# EAGLE board mega_shield_0_1 (EAGLE 6.5.0)
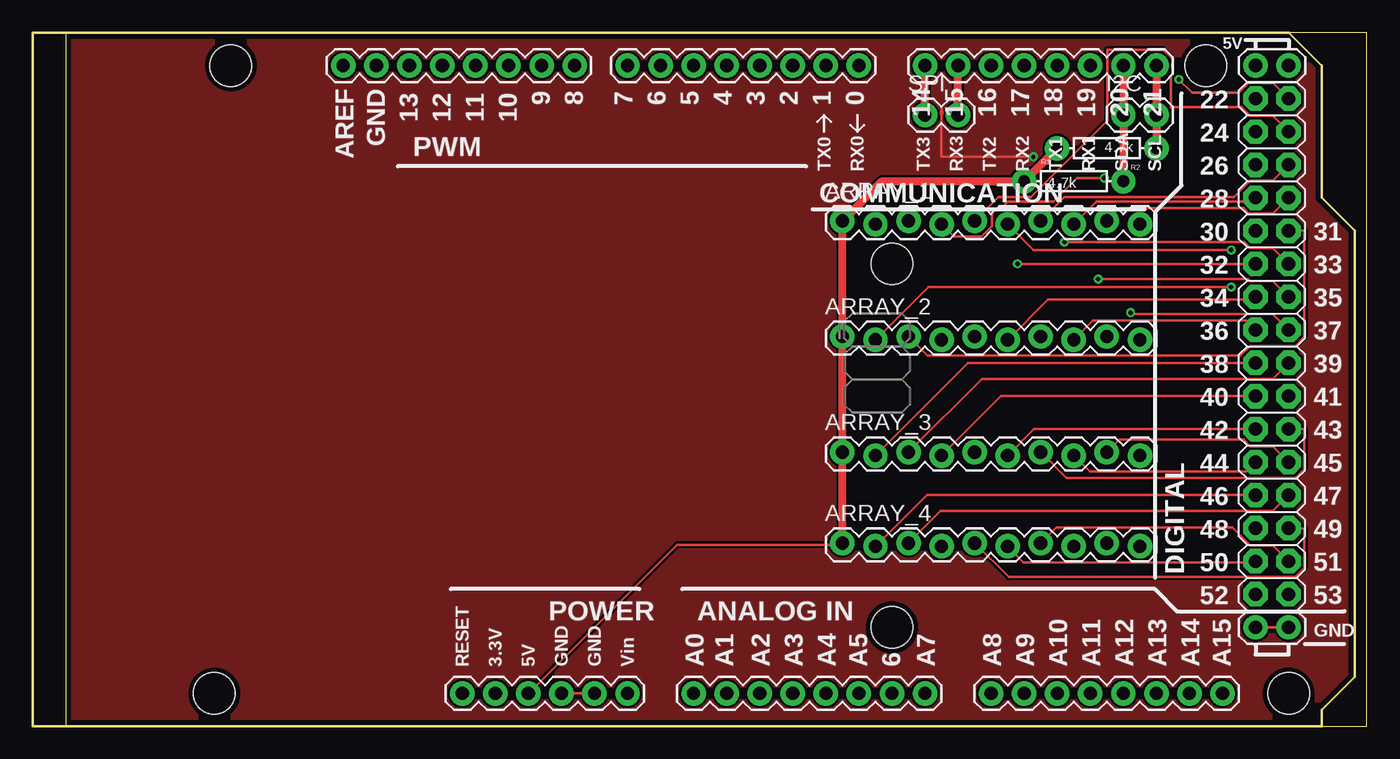
[diagram p0: board, top side]
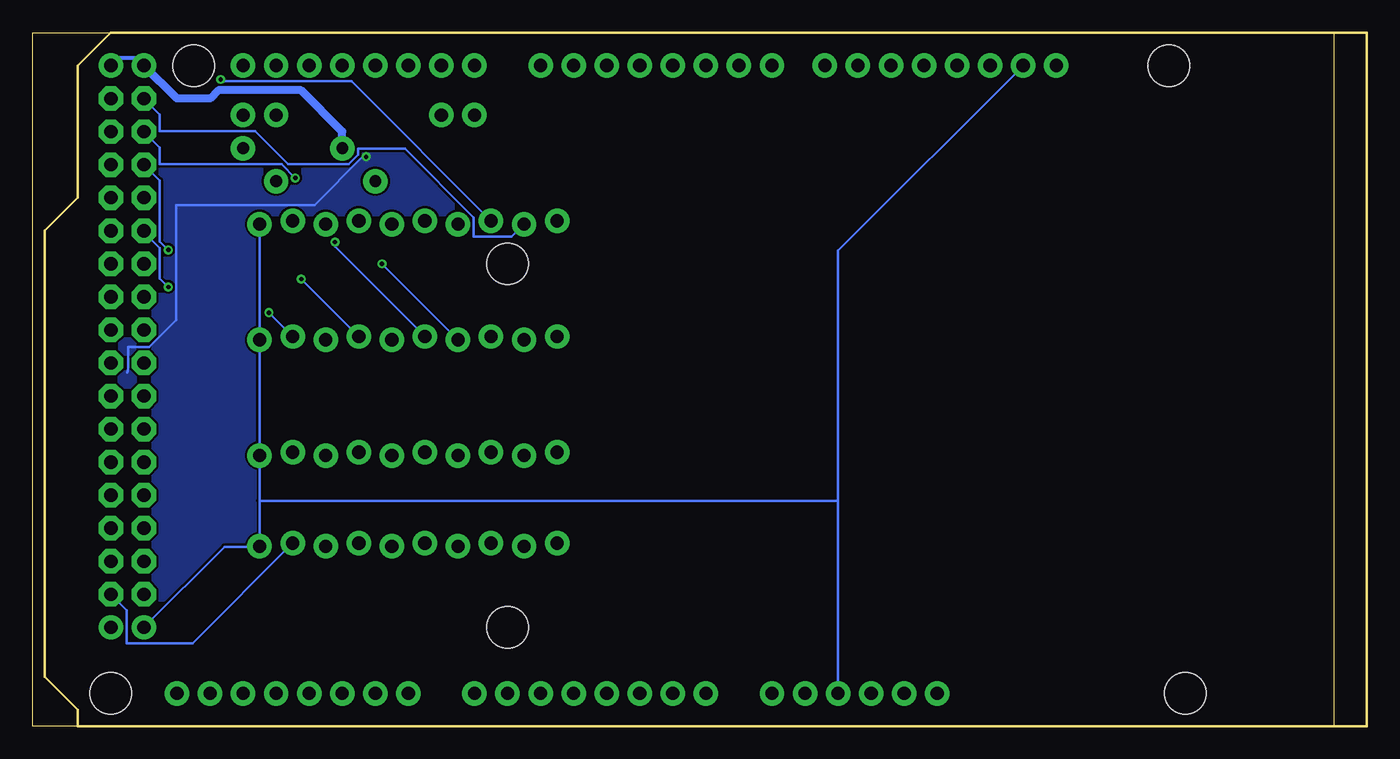
[diagram p1: board, bottom side, seen from below]

Size 100 x 53.33 mm. Coordinates in mm from the lower left corner, seen from the top.
Outline: 0,0 100,0 100,53.33 0,53.33 0,0
Copper layers (1*16): Top 0.0356mm / dielectric 1.5011mm / Bottom 0.0356mm
Design rules "oshPark": minimum track width 6mil, minimum drill 13mil, track to track 6mil, track to pad 6mil, pad to pad 6mil, via to via 6mil, smd to smd 6mil, copper to edge 15mil, drill to drill 6mil, minimum pad ring 7mil, minimum via ring 7mil, stop-mask expansion 3mil, vias tented up to drill 0mil, thermal gap 10mil
Net classes: 0 default: width 0.178 mm, drill 0.254 mm, clearance 0.178 mm

## Footprints (pad centres in the part's own frame; a part is rotated, then mirrored left to right if it is on the bottom)
1X10_LOCK = drill 1.016 pad 1.88: 1 0,0.127; 2 2.54,-0.127; 3 5.08,0.127; 4 7.62,-0.127; 5 10.16,0.127; 6 12.7,-0.127; 7 15.24,0.127; 8 17.78,-0.127; 9 20.32,0.127; 10 22.86,-0.127
1X02 = drill 1.016 pad 1.88: 1 0,0; 2 2.54,0
ARDUINO_MEGA = drill 1.016 pad 1.88: 0 63.5,50.8; 1 60.96,50.8; 2 58.42,50.8; 3 55.88,50.8; 3.3V 35.56,2.54; 4 53.34,50.8; 5 50.8,50.8; 5V@0 38.1,2.54; 5V@1 93.98,50.8; 5V@2 96.52,50.8; 6 48.26,50.8; 7 45.72,50.8; 8 41.656,50.8; 9 39.116,50.8; 10 36.576,50.8; 11 34.036,50.8; 12 31.496,50.8; 13 28.956,50.8; 14 68.58,50.8; 15 71.12,50.8; 16 73.66,50.8; 17 76.2,50.8; 18 78.74,50.8; 19 81.28,50.8; 20 83.82,50.8; 21 86.36,50.8; A0 50.8,2.54; A1 53.34,2.54; A2 55.88,2.54; A3 58.42,2.54; A4 60.96,2.54; A5 63.5,2.54; A6 66.04,2.54; A7 68.58,2.54; A8 73.66,2.54; A9 76.2,2.54; A10 78.74,2.54; A11 81.28,2.54; A12 83.82,2.54; A13 86.36,2.54; A14 88.9,2.54; A15 91.44,2.54; AREF 23.876,50.8; GND@0 40.64,2.54; GND@1 43.18,2.54; GND@2 93.98,7.62; GND@3 96.52,7.62; GND@4 26.416,50.8; RESET 33.02,2.54; VIN 45.72,2.54 | drill 1.016 pad 1.88 octagon: 22 93.98,48.26; 23 96.52,48.26; 24 93.98,45.72; 25 96.52,45.72; 26 93.98,43.18; 27 96.52,43.18; 28 93.98,40.64; 29 96.52,40.64; 30 93.98,38.1; 31 96.52,38.1; 32 93.98,35.56; 33 96.52,35.56; 34 93.98,33.02; 35 96.52,33.02; 36 93.98,30.48; 37 96.52,30.48; 38 93.98,27.94; 39 96.52,27.94; 40 93.98,25.4; 41 96.52,25.4; 42 93.98,22.86; 43 96.52,22.86; 44 93.98,20.32; 45 96.52,20.32; 46 93.98,17.78; 47 96.52,17.78; 48 93.98,15.24; 49 96.52,15.24; 50 93.98,12.7; 51 96.52,12.7; 52 93.98,10.16; 53 96.52,10.16 | hole 3.2: 15.24,50.8; 13.97,2.54; 66.04,35.56; 66.04,7.62; 90.17,50.8; 96.52,2.54
AXIAL-0.3 = drill 0.9 pad 1.88: P$1 -3.81,0; P$2 3.81,0

## Placement (x,y rotation side)
ARRAY_1  M10LOCK  [1X10_LOCK]  59.69,38.73 0 top
ARRAY_2  M10LOCK  [1X10_LOCK]  59.69,29.84 0 top
ARRAY_3  M10LOCK  [1X10_LOCK]  59.69,20.95 0 top
ARRAY_4  M10LOCK  [1X10_LOCK]  59.69,13.97 0 top
I2C  [1X02]  81.28,46.99 0 top
PCB1  ARDUINO-MEGAFULL  [ARDUINO_MEGA]  -2.54,0 0 top
R1  4.7k  [AXIAL-0.3]  77.47,41.91 0 top
R2  4.7k  [AXIAL-0.3]  80.01,44.45 180 top
SPI  [1X02]  66.04,46.99 0 top

## Library data of the parts
ARRAY_1-ARRAY_4 I2C R1 R2 SPI = SparkFun
PCB1 = SparkFun-Boards

## Nets
GND: ARRAY_1.10 ARRAY_2.10 ARRAY_3.10 ARRAY_4.10 PCB1.GND@0 PCB1.GND@1 PCB1.GND@2 PCB1.GND@3 PCB1.GND@4
N$1: ARRAY_1.2 PCB1.22
N$2: ARRAY_1.9 PCB1.29
N$3: ARRAY_1.3 PCB1.23
N$4: ARRAY_1.4 PCB1.24
N$5: ARRAY_1.5 PCB1.25
N$6: ARRAY_1.6 PCB1.26
N$7: ARRAY_1.7 PCB1.27
N$8: ARRAY_1.8 PCB1.28
N$9: PCB1.14 SPI.1
N$10: PCB1.15 SPI.2
N$11: ARRAY_2.2 PCB1.30
N$12: ARRAY_2.3 PCB1.31
N$13: ARRAY_2.4 PCB1.32
N$14: ARRAY_2.5 PCB1.33
N$15: ARRAY_2.6 PCB1.34
N$16: ARRAY_2.7 PCB1.35
N$17: ARRAY_2.8 PCB1.36
N$18: ARRAY_2.9 PCB1.37
N$19: ARRAY_3.2 PCB1.38
N$20: ARRAY_3.3 PCB1.39
N$21: ARRAY_3.4 PCB1.40
N$22: ARRAY_3.5
N$23: ARRAY_3.6 PCB1.42
N$24: ARRAY_3.7 PCB1.43
N$25: ARRAY_3.8 PCB1.44
N$26: ARRAY_3.9 PCB1.45
N$27: ARRAY_4.2 PCB1.46
N$28: ARRAY_4.3 PCB1.47
N$29: ARRAY_4.4
N$30: ARRAY_4.5 PCB1.49
N$31: ARRAY_4.6 PCB1.50
N$32: ARRAY_4.7 PCB1.51
N$33: ARRAY_4.8
N$34: ARRAY_4.9 PCB1.53
N$35: I2C.1 PCB1.20 R1.P$2
N$36: I2C.2 PCB1.21 R2.P$1
VCC: ARRAY_1.1 ARRAY_2.1 ARRAY_3.1 ARRAY_4.1 PCB1.5V@0 PCB1.5V@1 PCB1.5V@2 R1.P$1 R2.P$2

## Tracks (layer width: path | path; a pad name or v marks a point on that pad's centre or on a via)
GND
  Top 0.178: PCB1.GND@3 PCB1.GND@2 | PCB1.GND@1 PCB1.GND@0
  Bottom 0.178: 82.55,17.35 ARRAY_3.10 ARRAY_2.10 ARRAY_1.10 | 82.55,17.35 ARRAY_4.10 82.63,13.82 85.24,13.82 PCB1.GND@2 | PCB1.GND@4 38.1,36.58 38.1,17.35 | PCB1.GND@0 38.1,17.35 | 38.1,17.35 82.55,17.35
GND1  (via drill 0.33)
  Top 0.178: v74.37,43.79 67.28,43.79 67.28,47.04 67.33,47.04 67.33,47.07 67.26,47.07 67.26,47.09 67.36,47.09 67.36,47.12 67.26,47.12 67.26,47.14 67.36,47.14 67.36,47.17 67.26,47.17 67.26,47.19 67.36,47.19 67.36,47.22 67.26,47.22 67.26,47.24 67.36,47.24 67.36,47.27 67.26,47.27 67.26,47.3 67.33,47.3 67.33,47.35 67.31,47.64
  Bottom 0.178: v74.37,43.79 74.62,43.79 78.33,40.08 88.95,40.08 88.95,31.24 91.03,29.16 92.66,29.16 92.66,27.48 92.71,27.2
  pour Bottom: -2.54,53.34 -2.54,0 96.52,0 96.52,1.27 99.06,3.81 99.06,38.1 96.52,40.64 96.52,50.8 93.98,53.34
  pour Top: 96.52,0 96.52,1.27 99.06,3.81 99.06,38.1 96.52,40.64 96.52,50.8 93.98,53.34 -2.54,53.34 -2.54,0
N$1
  Bottom 0.178: ARRAY_1.2 63.2,37.64 66.09,37.64 66.09,39.12 71.37,44.4 74.98,44.4 74.98,43.94 75.69,43.23 80.37,43.23 82.91,45.77 90.22,45.77 90.22,47.04 PCB1.22
N$2
  Top 0.178: ARRAY_1.9 80.97,39.83 90.53,39.83 90.93,39.42 92.76,39.42 PCB1.29
N$3  (via drill 0.33)
  Top 0.178: v85.55,49.73 86.56,48.72 90.17,48.72 90.93,49.48 92.76,49.48 PCB1.23
  Bottom 0.178: ARRAY_1.3 75.49,49.58 85.55,49.58 v85.55,49.73
N$4  (via drill 0.33)
  Top 0.178: ARRAY_1.4 68.28,37.64 70.36,37.64 71.17,38.46 71.17,39.67 71.73,39.67 72.39,40.34 75.89,40.34 77.72,42.16 v79.81,42.16
  Bottom 0.178: v79.81,42.16 80.87,43.23 90.22,43.23 90.22,44.5 PCB1.24
N$5
  Top 0.178: ARRAY_1.5 71.68,40.69 74.17,40.69 80.06,46.58 80.06,52.02 84.33,52.02 85.04,51.31 85.04,50.09 84.94,49.99 84.94,47.6 90.37,47.6 91.03,46.94 92.76,46.94 PCB1.25
N$6  (via drill 0.33)
  Top 0.178: ARRAY_1.6 74.37,36.63 v89.56,36.63
  Bottom 0.178: v89.56,36.63 90.22,37.29 90.22,41.96 PCB1.26
N$7
  Top 0.178: ARRAY_1.7 76.76,40.69 89.76,40.69 91.03,41.96 92.76,41.96 PCB1.27
N$8
  Top 0.178: ARRAY_1.8 79.2,40.34 90.45,40.34 90.68,40.56 PCB1.28
  Top 0.305: PCB1.28 90.81,40.64
N$9
  Top 0.61: SPI.1 PCB1.14
N$10
  Top 0.61: SPI.2 PCB1.15
N$11  (via drill 0.33)
  Top 0.178: ARRAY_2.2 66.29,33.78 v89.56,33.78
  Bottom 0.178: v89.56,33.78 90.22,34.44 90.22,36.78 91.44,38 PCB1.30
N$12
  Top 0.178: ARRAY_2.3 66.24,28.5 90.27,28.5 91.03,29.26 94.49,29.26 95.2,29.97 95.2,38.1 PCB1.31
N$13  (via drill 0.33)
  Top 0.178: PCB1.32 v73.15,35.56
  Bottom 0.178: v73.15,35.56 ARRAY_2.4
N$14  (via drill 0.33)
  Top 0.178: v76.76,37.24 90.58,37.24 91.03,36.78 92.76,36.78 PCB1.33
  Bottom 0.178: ARRAY_2.5 76.76,36.88 v76.76,37.24
N$15
  Top 0.178: ARRAY_2.6 75.49,32.82 91.24,32.82 PCB1.34
N$16  (via drill 0.33)
  Top 0.178: v79.35,34.39 90.88,34.39 91.03,34.24 92.76,34.24 PCB1.35
  Bottom 0.178: v79.35,34.39 ARRAY_2.7
N$17
  Top 0.178: ARRAY_2.8 78.94,31.19 90.73,31.19 PCB1.36
N$18  (via drill 0.33)
  Top 0.178: v81.84,31.8 81.94,31.7 92.76,31.7 PCB1.37
  Bottom 0.178: v81.84,31.8 ARRAY_2.9
N$19
  Top 0.178: ARRAY_3.2 69.34,27.94 PCB1.38
N$20
  Top 0.178: ARRAY_3.3 70.41,26.72 92.76,26.72 PCB1.39
N$21
  Top 0.178: ARRAY_3.4 71.88,25.4 PCB1.40
N$23
  Top 0.178: ARRAY_3.6 74.42,22.86 PCB1.42
N$24
  Top 0.178: ARRAY_3.7 76.91,19.1 94.49,19.1 95.2,19.81 95.2,22.86 PCB1.43
N$25
  Top 0.178: ARRAY_3.8 78.69,19.61 90.73,19.61 PCB1.44
N$26
  Top 0.178: ARRAY_3.9 80.97,22.05 90.53,22.05 91.03,21.54 92.76,21.54 PCB1.45
N$27
  Top 0.178: ARRAY_4.2 66.17,17.78 PCB1.46
N$28
  Top 0.178: ARRAY_4.3 67.23,16.56 92.76,16.56 PCB1.47
N$30
  Top 0.178: ARRAY_4.5 72.47,11.48 94.49,11.48 95.2,12.19 95.2,15.24 PCB1.49
N$31
  Top 0.178: ARRAY_4.6 73.61,12.62 91.36,12.62 PCB1.50
N$32
  Top 0.178: ARRAY_4.7 76.15,15.32 89.64,15.32 91.03,13.92 92.76,13.92 PCB1.51
N$34
  Bottom 0.178: ARRAY_4.9 87.71,6.4 92.76,6.4 92.76,8.94 PCB1.53
N$35
  Top 0.61: PCB1.20 I2C.1 R1.P$2
N$36
  Top 0.61: PCB1.21 I2C.2 R2.P$1
VCC
  Top 0.178: PCB1.5V@0 46.99,13.97 59.41,13.97 ARRAY_4.1
  Top 0.61: R2.P$2 R1.P$1 62.74,41.91 ARRAY_1.1 ARRAY_2.1 ARRAY_3.1 ARRAY_4.1
  Bottom 0.305: PCB1.5V@2 93.98,51.33 93.95,51.36 91.44,51.36 PCB1.5V@1
  Bottom 0.61: R2.P$2 76.2,45.72 79.38,48.9 85.72,48.9 86.36,48.26 88.9,48.26 PCB1.5V@1